# Altium PCB mantarray_beta2_sensor_back.PcbDoc
Units mm, origin at the board's own origin, x right, y up, seen from the top; angles counter-clockwise.
Board outline 170 x 250 mm, 6 copper layers (Top Layer, GND1, Signal1, Int3 (Sign), AVDD, Bottom Layer), stack 1.551 mm thick; 69 components, 203 nets, 440 pads, 69 vias.
Unrouted connection lines stored in the file: 166.
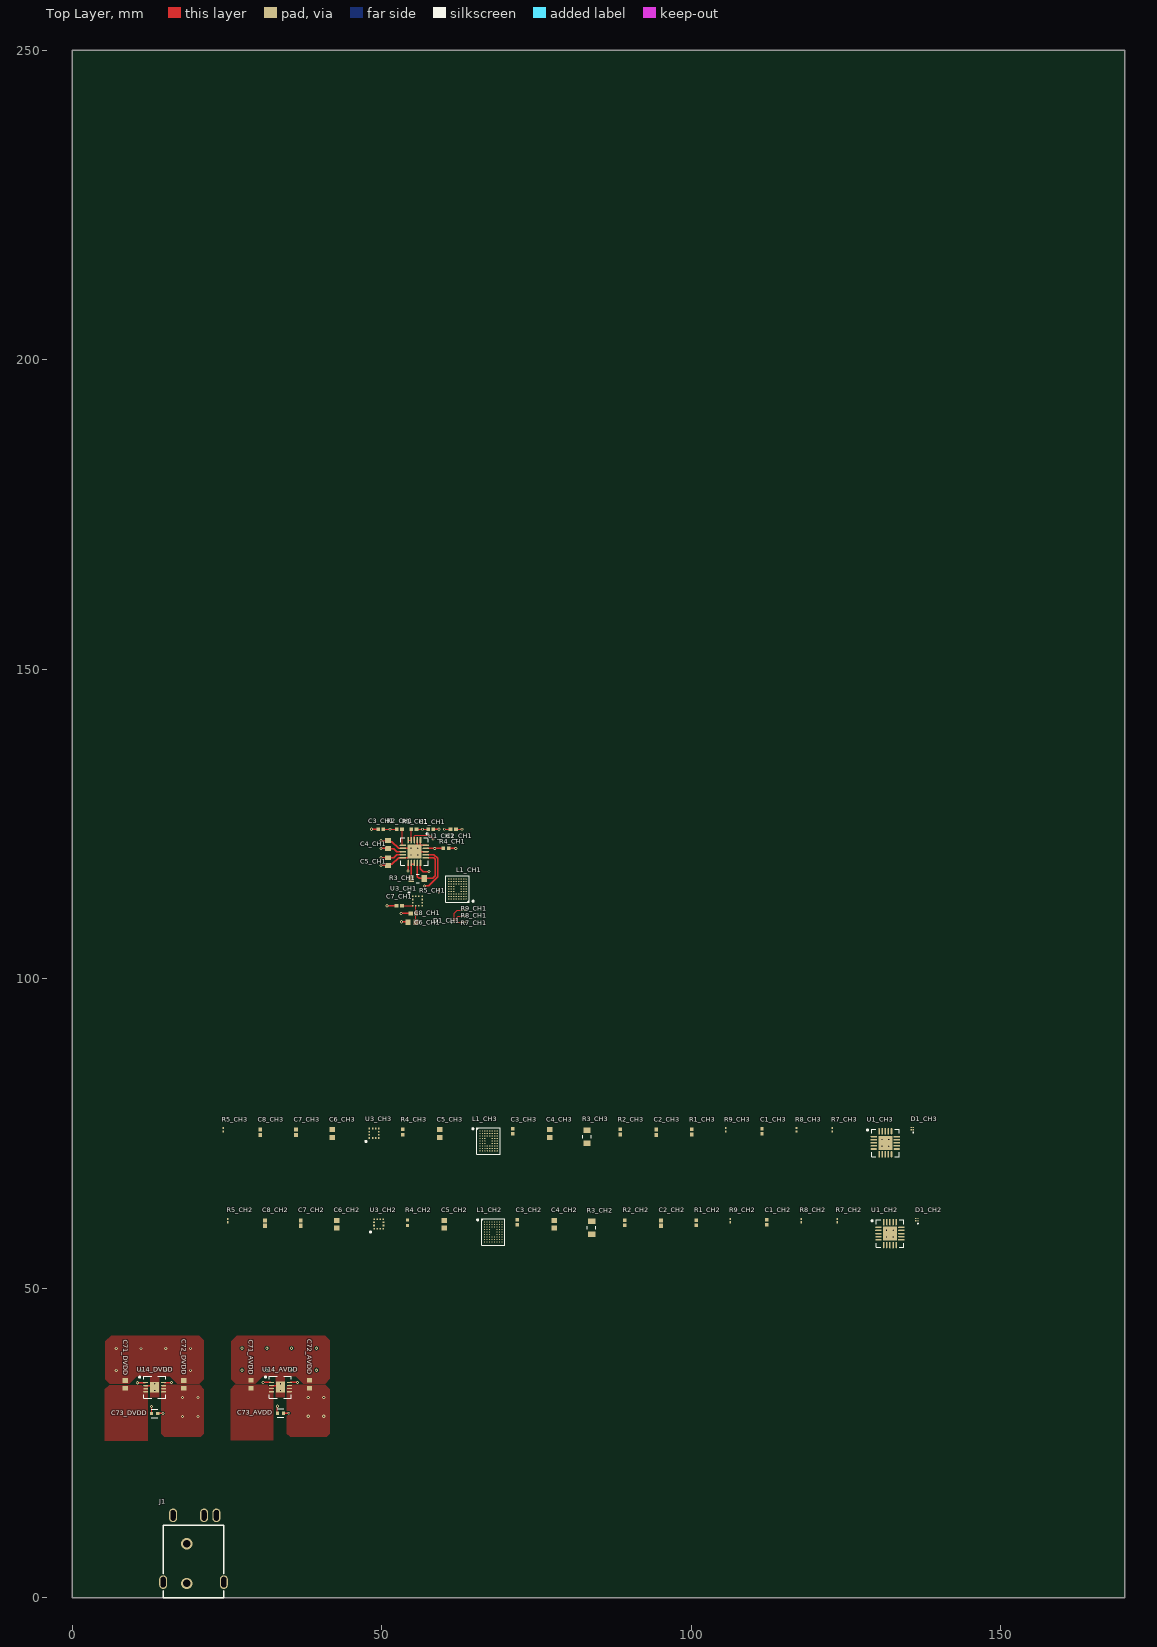
[diagram p0: Top Layer view]
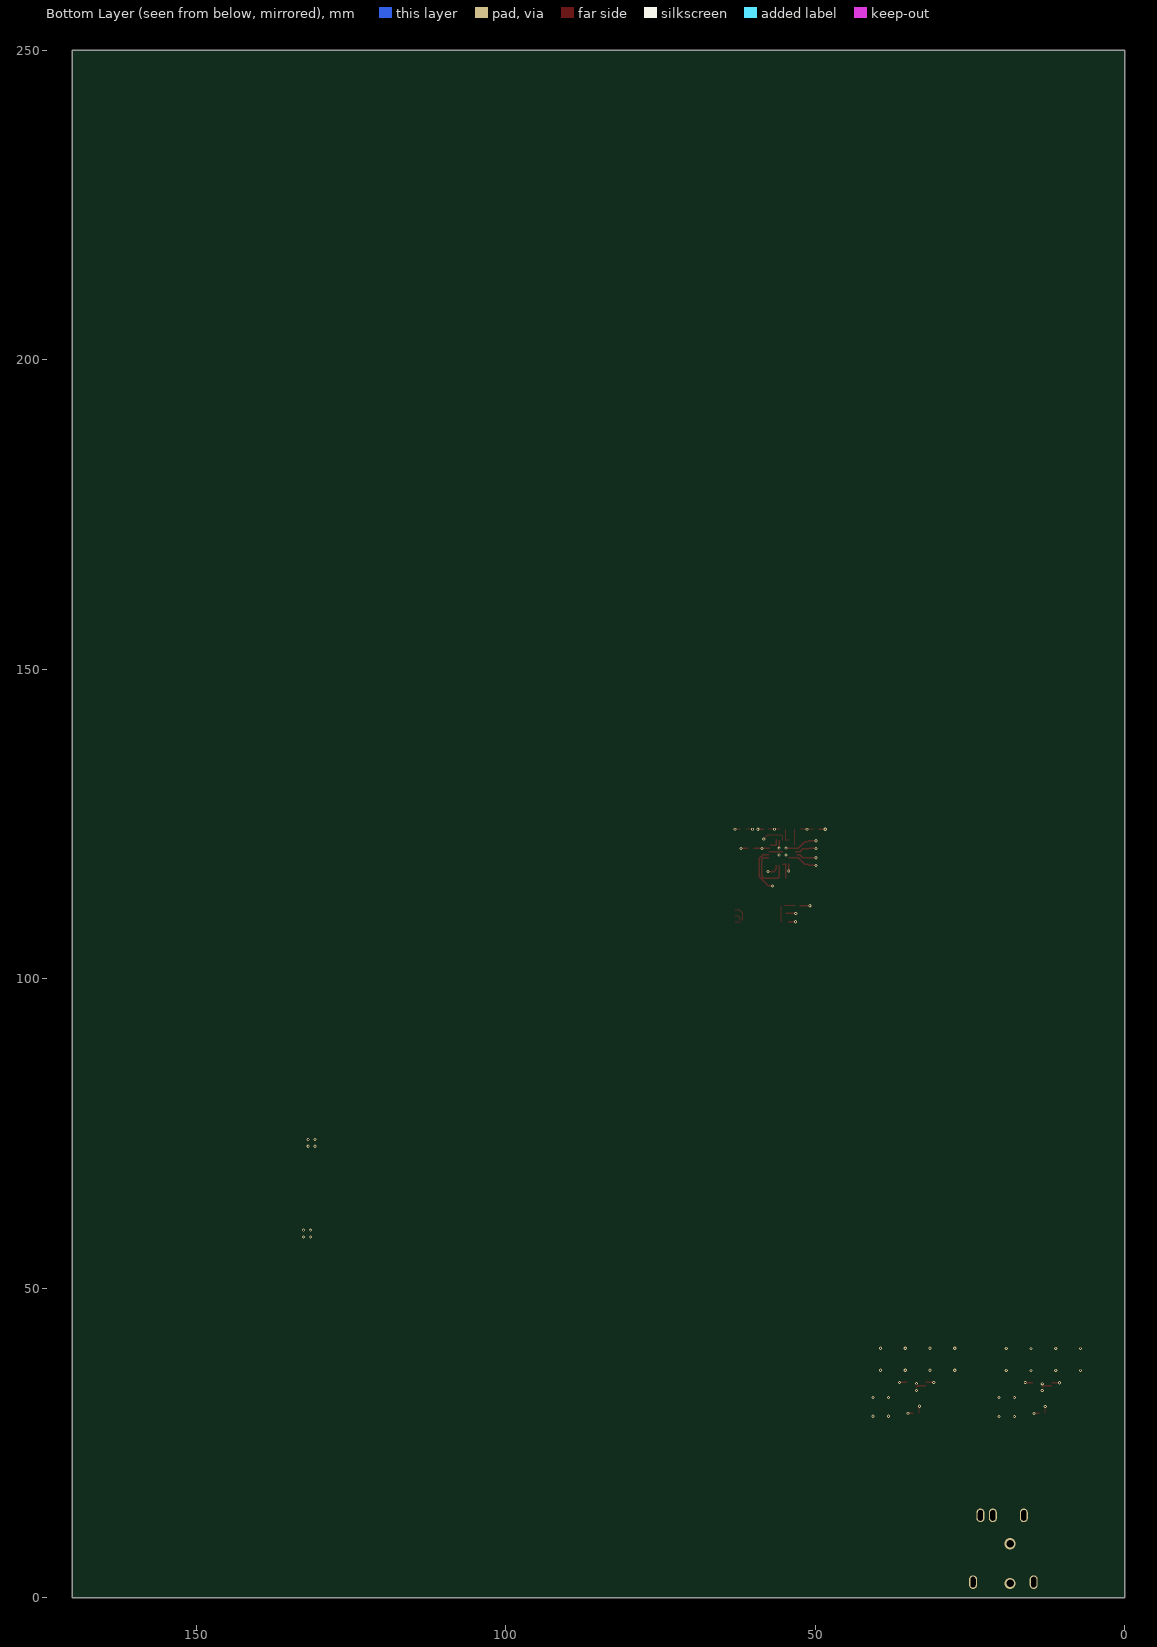
[diagram p1: Bottom Layer view, seen from below]
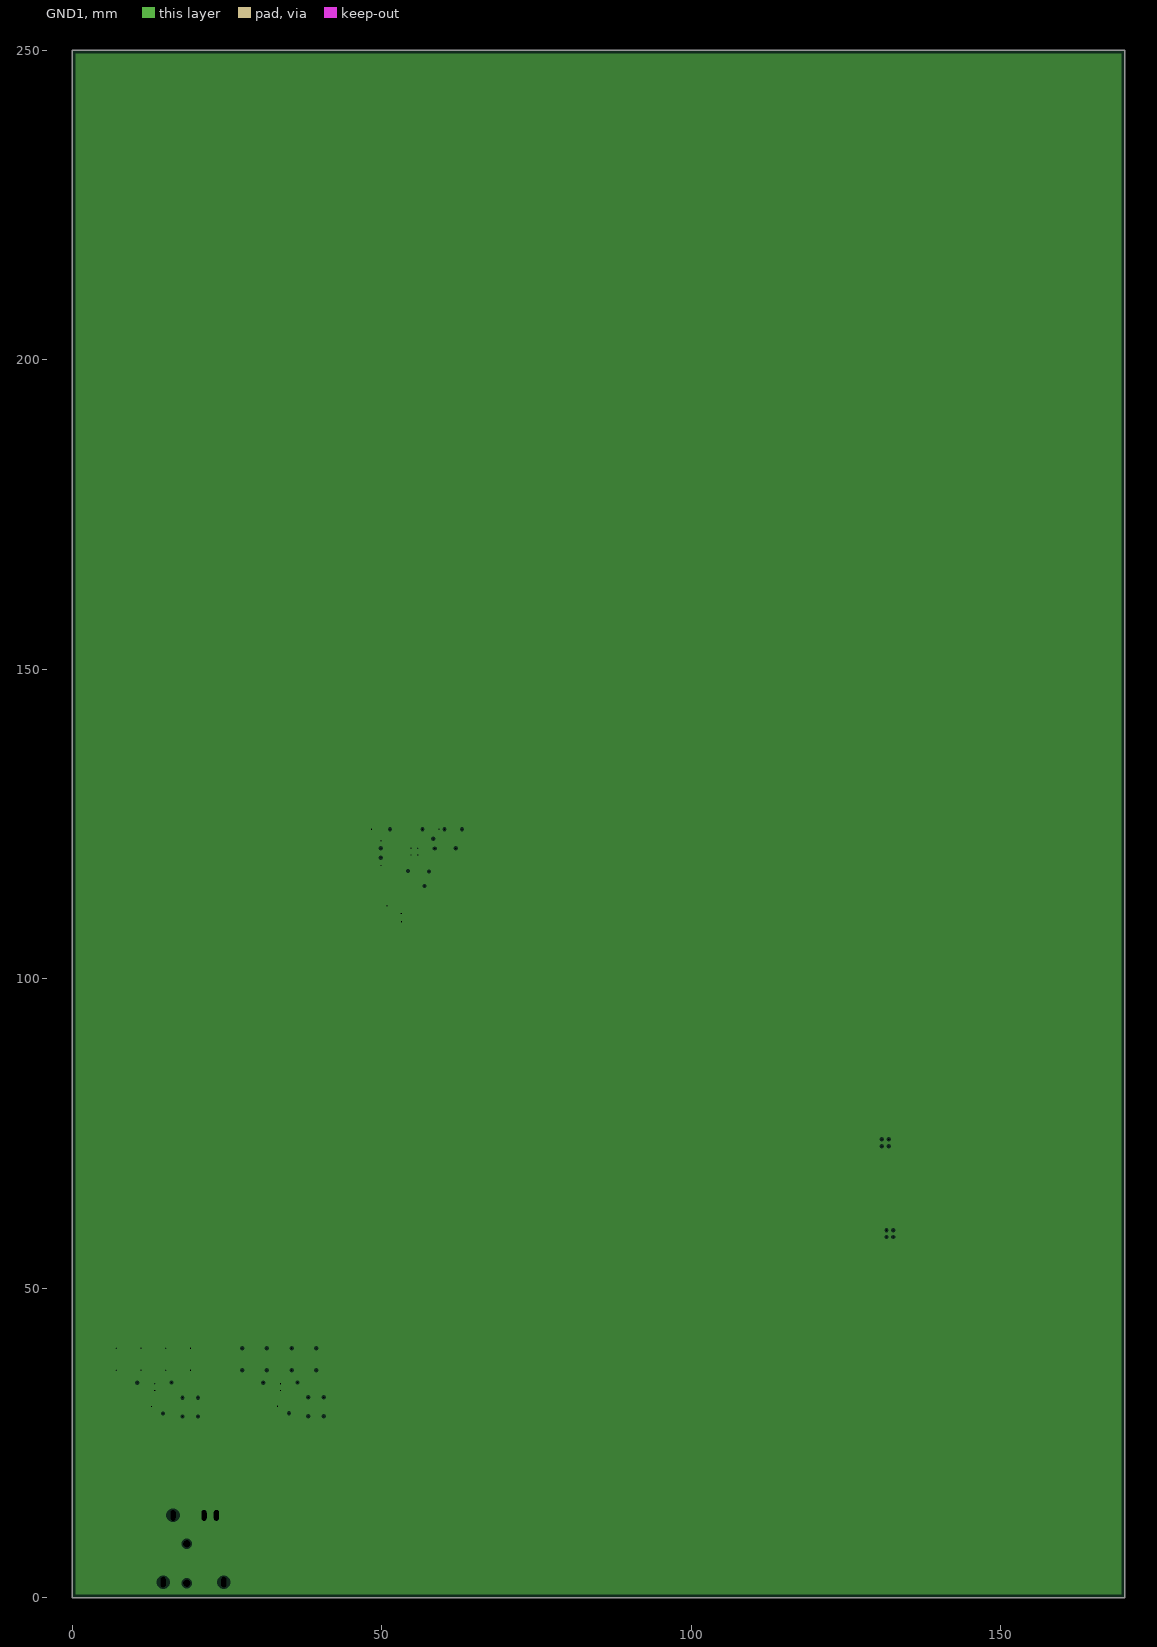
[diagram p2: GND1, clearances drawn from the general rule]
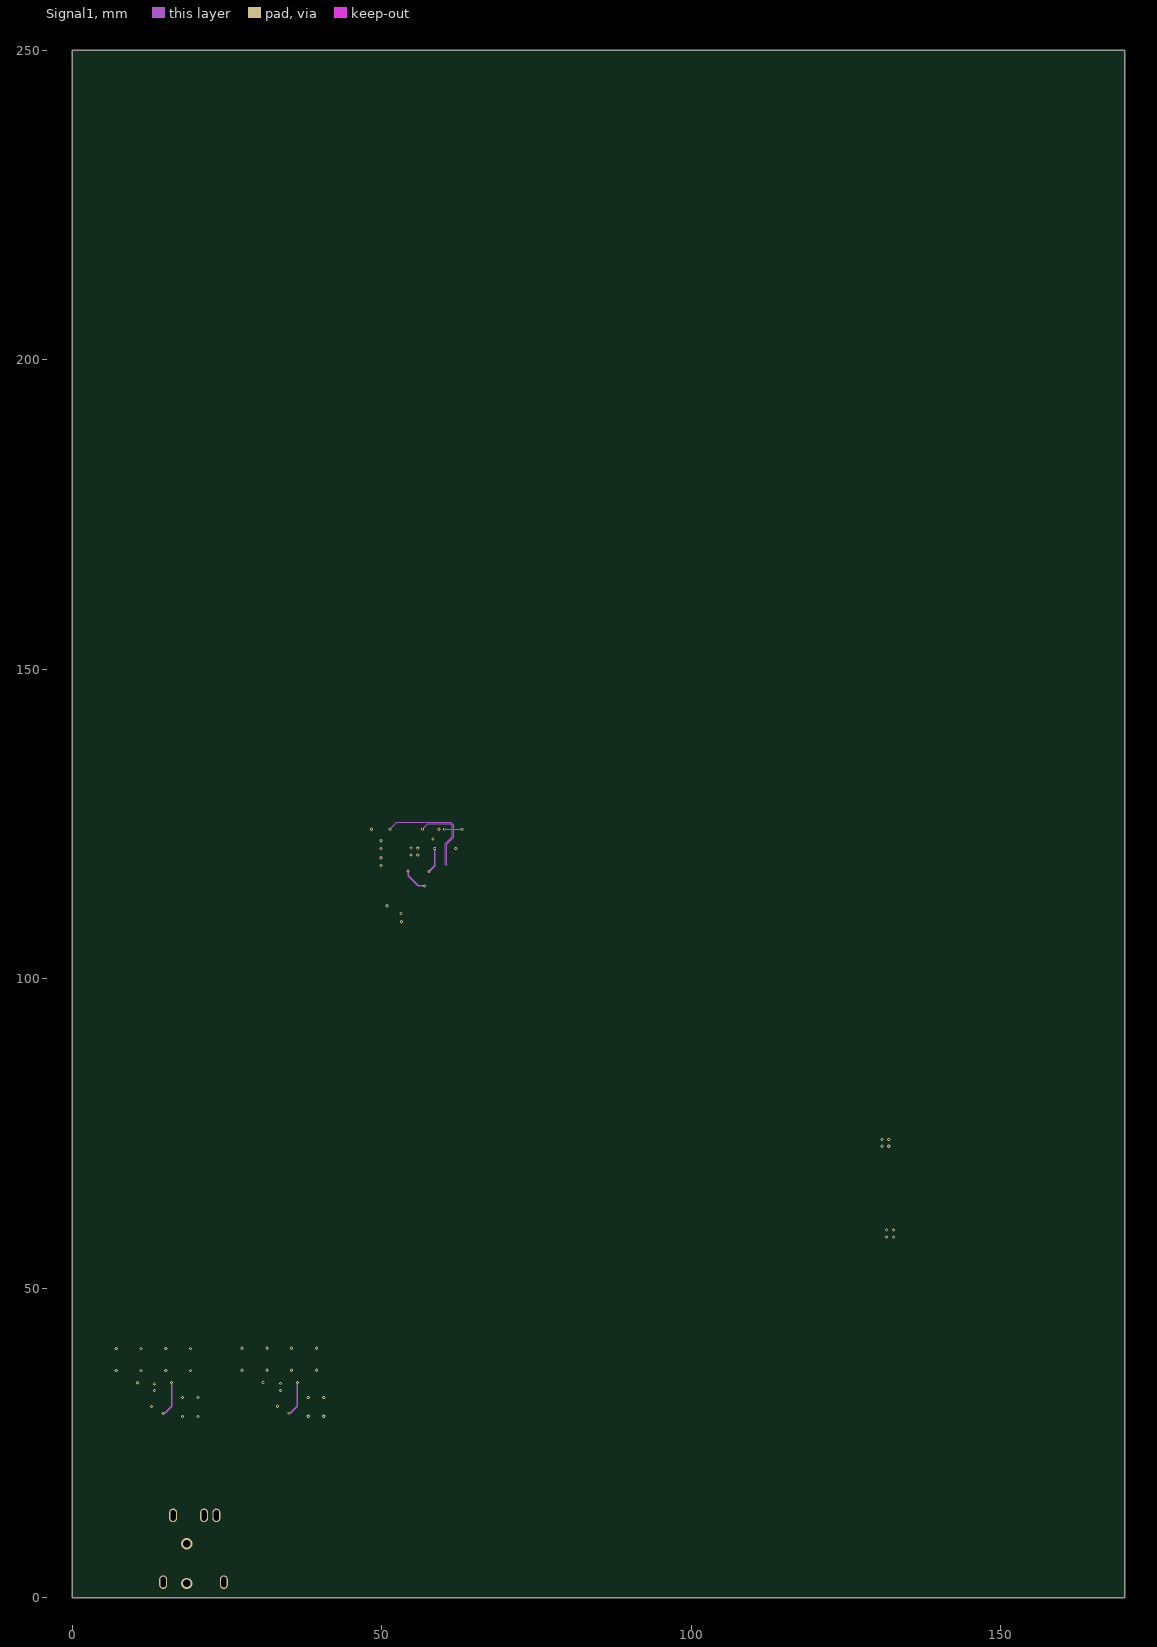
[diagram p3: Signal1]
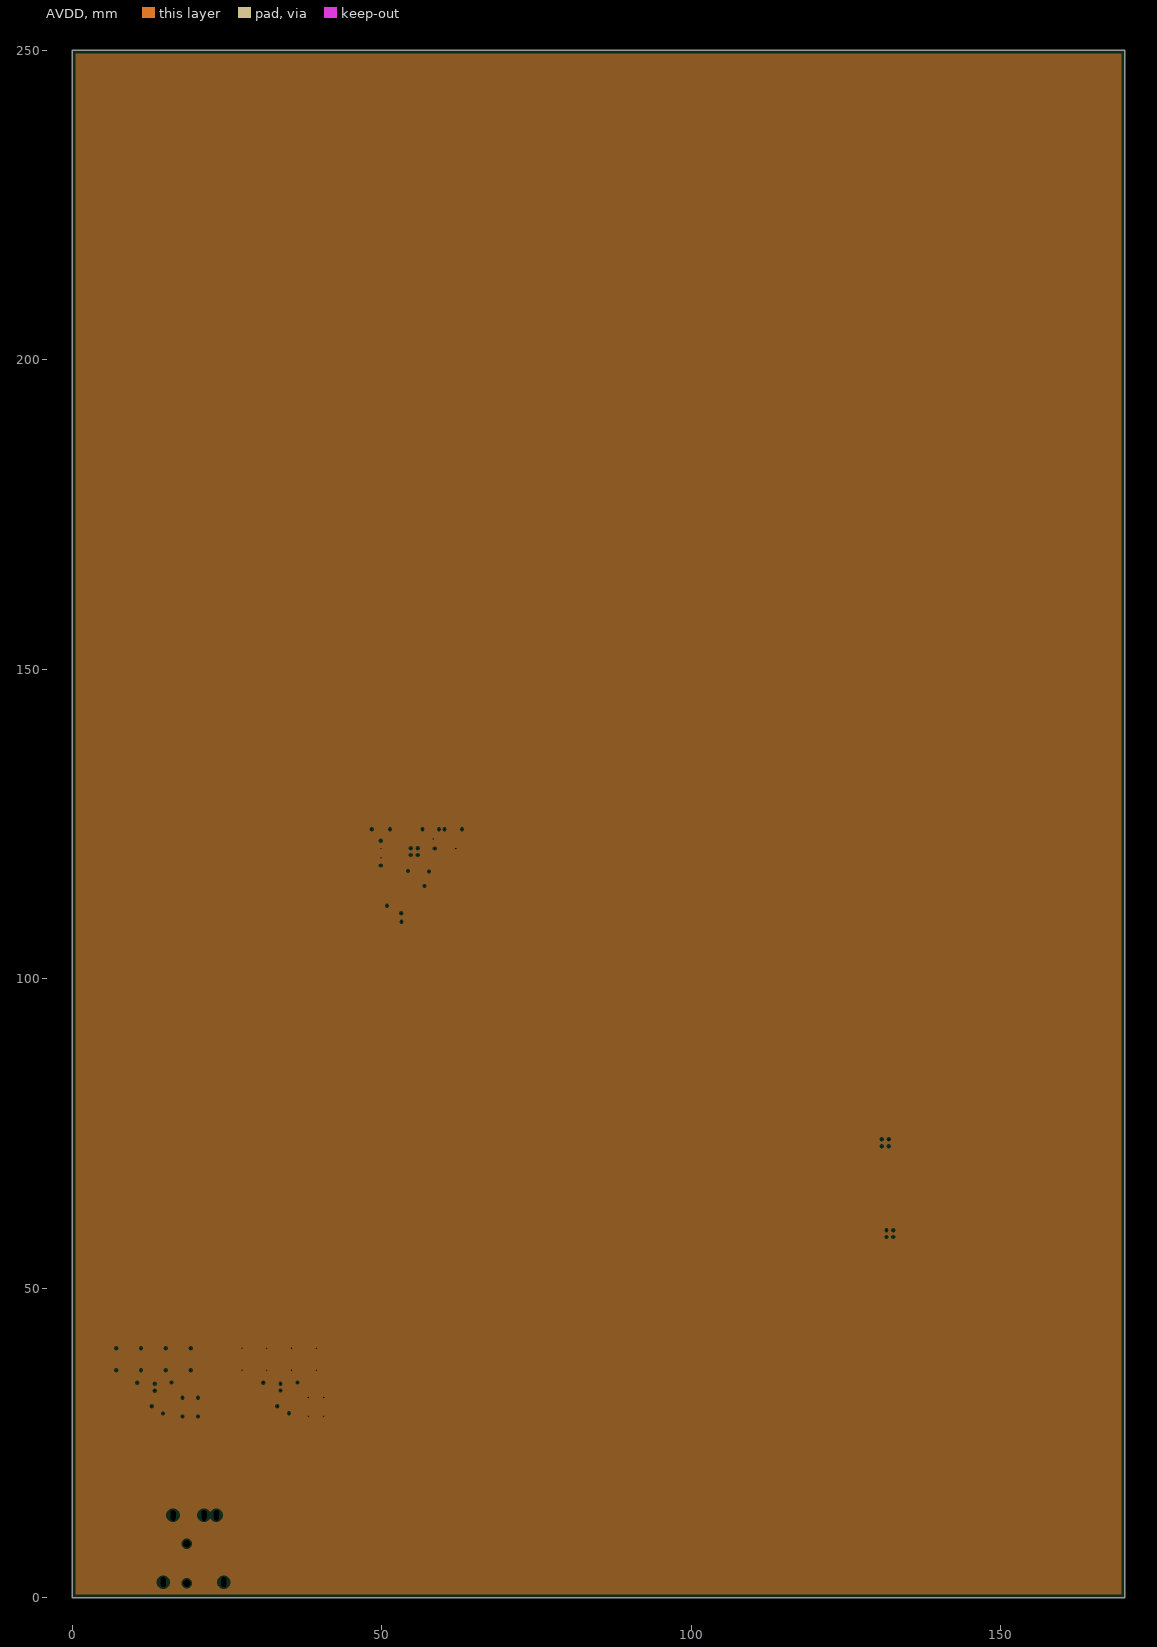
[diagram p4: AVDD, clearances drawn from the general rule]

## Layer stack, top to bottom
Top Solder: solder mask 0.0254, SM-001, Dk 4
Top Layer: signal copper 0.035
Dielectric 1: prepreg 0.0711, PP-006, Dk 4.1
Dielectric 2: prepreg 0.0711, PP-006, Dk 4.1
GND1: plane copper 0.035, net GND
Dielectric 3: core 0.4572, Core-035, Dk 4.7
Signal1: signal copper 0.035
Dielectric 4: prepreg 0.0711, PP-006, Dk 4.1
Dielectric 5: prepreg 0.0711, PP-006, Dk 4.1
Int3 (Sign): signal copper 0.035
Dielectric 6: core 0.4572, Core-035, Dk 4.7
AVDD: plane copper 0.035, net AVDD
Dielectric 7: prepreg 0.0711, PP-006, Dk 4.1
Dielectric 8: prepreg 0.0711, PP-006, Dk 4.1
Bottom Layer: signal copper 0.035
Bottom Solder: solder mask 0.0254, SM-001, Dk 4

## Board outline
0,0 170,0 170,250 0,250

## Design rules (kind name [scope] priority, off if disabled: settings)
Clearance "Clearance SPI CMOS" [InNetClass('SPI CMOS') vs InNetClass('SPI CMOS')] p1: gap=0.127 ignorepadtopadclearanceinfootprint=TRUE
Clearance [All] p2: gap=0.127 ignorepadtopadclearanceinfootprint=FALSE
DiffPairsRouting [All] p1: maxlimit=1.27 minlimit=0.127 mostfreqgap=0.127 toplayer_minwidth=0.127 toplayer_maxwidth=0.254 toplayer_prefwidth=0.127 midlayer1_minwidth=0.127 midlayer1_maxwidth=0.254 midlayer1_prefwidth=0.127 midlayer2_minwidth=0.127 midlayer2_maxwidth=0.254 midlayer2_prefwidth=0.127 bottomlayer_minwidth=0.127 bottomlayer_maxwidth=0.254 bottomlayer_prefwidth=0.127 maxuncoupledlength=25.4
HoleSize [All] p1: absolutevalues=TRUE maxlimit=5.08 minlimit=0.127 maxpercent=80.000 minpercent=20.000
MinimumAnnularRing [All] p1: minimumring=0.1
MinimumSolderMaskSliver SoldermaskSliver_pad [InPadClass('All Pads') vs InPadClass('All Pads')] p1: minsoldermaskwidth=0.025
MinimumSolderMaskSliver [All] p2: minsoldermaskwidth=0.025
PlaneClearance [All] p1: clearance=0.254
PlaneConnect [All] p1: planeconnectstyle=Direct reliefexpansion=0.508 reliefentries=4 reliefconductorwidth=0.254 reliefairgap=0.254
PolygonConnect PolygonConnect_1 [All vs IsNamedPolygon('GND_L01_P047')] p1: thpad.connectstyle=Direct thpad.reliefconductorwidth=0.254 thpad.reliefentries=4 thpad.polygonreliefangle="90 Angle" thpad.airgapwidth=0.254 smdpad.connectstyle=Direct smdpad.reliefconductorwidth=0.254 smdpad.reliefentries=4 smdpad.polygonreliefangle="90 Angle" smdpad.airgapwidth=0.254 via.connectstyle=Relief via.reliefconductorwidth=0.254 via.reliefentries=4 via.polygonreliefangle="90 Angle" via.airgapwidth=0.254
PolygonConnect [All] p2: connectstyle=Direct reliefconductorwidth=0.254 reliefentries=4 polygonreliefangle="90 Angle" airgapwidth=0.254
RoomDefinition CH3 [InComponentClass('CH3')] p1: confinementstyle=ConfineIn formatcopy=TRUE lockcomponents=FALSE outline 23.85,70.69 139.85,70.69 139.85,77.99 23.85,77.99
RoomDefinition CH2 [InComponentClass('CH2')] p2: confinementstyle=ConfineIn formatcopy=TRUE lockcomponents=FALSE outline 24.6,56.025 140.6,56.025 140.6,63.275 24.6,63.275
RoomDefinition mantarray_beta2_sensor [InComponentClass('mantarray_beta2_sensor')] p3: confinementstyle=ConfineIn formatcopy=TRUE lockcomponents=FALSE outline 0,0 50.8,0 50.8,25.4 0,25.4
RoomDefinition CH1 [InComponentClass('CH1')] p4: confinementstyle=ConfineIn formatcopy=TRUE lockcomponents=FALSE outline 46,107.8 65.5,107.8 65.5,127.3 46,127.3
RoomDefinition AVDD [InComponentClass('AVDD')] p5: confinementstyle=ConfineIn formatcopy=TRUE lockcomponents=FALSE outline 24.925,27.7 42.225,27.7 42.225,41.55 24.925,41.55
RoomDefinition DVDD [InComponentClass('DVDD')] p6: confinementstyle=ConfineIn formatcopy=TRUE lockcomponents=FALSE outline 4.599,27.675 21.899,27.675 21.899,41.525 4.599,41.525
RoutingVias PowerVias [InNetClass('POWER')] p1: holewidth=0.203 width=0.508 viastyle="Through Hole" minholewidth=0.203 minwidth=0.508 maxholewidth=0.203 maxwidth=1.27
RoutingVias [All] p2: holewidth=0.152 width=0.457 viastyle="Through Hole" minholewidth=0.127 minwidth=0.457 maxholewidth=0.5 maxwidth=1
SilkToSolderMaskClearance [IsPad] p1: minsilkscreentomaskgap=0.127 clearancetoexposedcopper=TRUE
SolderMaskExpansion [All] p1: expansion=0.127 istentingtop=FALSE
Width [All] p1: maxlimit=2 minlimit=0.127 preferedwidth=0.127
Width "SPI routing" [InNetClass('SPI CMOS')] p2: maxlimit=0.127 minlimit=0.127 preferedwidth=0.127
Width "Power width" [InNetClass('POWER')] p3: maxlimit=1.016 minlimit=0.203 preferedwidth=0.203
23 further rules are at their usual default settings.

## Classes and differential pairs
channel class Channel: CH1 CH2
component class CH2: C1_CH2 C2_CH2 C3_CH2 C4_CH2 C5_CH2 C6_CH2 C7_CH2 C8_CH2 D1_CH2 L1_CH2 R1_CH2 R2_CH2 R3_CH2 R4_CH2 R5_CH2 R7_CH2 R8_CH2 R9_CH2 U1_CH2 U3_CH2
component class CH1: C1_CH1 C2_CH1 C3_CH1 C4_CH1 C5_CH1 C6_CH1 C7_CH1 C8_CH1 D1_CH1 L1_CH1 R1_CH1 R2_CH1 R3_CH1 R4_CH1 R5_CH1 R7_CH1 R8_CH1 R9_CH1 U1_CH1 U3_CH1
channel class ADP1706_3p3: AVDD DVDD
component class DVDD: C71_DVDD C72_DVDD C73_DVDD U14_DVDD
component class AVDD: C71_AVDD C72_AVDD C73_AVDD U14_AVDD
component class mantarray_beta2_sensor: J1
net class Power: +5V AVDD AVDD_CH2 AVDD_CH3 AVDD_DVDD DVDD GND GND_CH2 GND_CH3
differential pair sd_adc1_in_CH3: +sd_adc1_in_CH3_P -sd_adc1_in_CH3_N
differential pair sd_adc1_in_CH2: +sd_adc1_in_CH2_P -sd_adc1_in_CH2_N
differential pair sd_adc1_in_CH1: +sd_adc1_in_CH1_P -sd_adc1_in_CH1_N

## Components (designator, comment, footprint, x,y, rotation, side; value= is the part's Value field where it differs from the comment)
C1_CH1 "GRM155R71C103KA01J" CAPC1005X55X25LL05T10 57.925,124.15 r180 top locked (schematic designator C1)
C1_CH2 "GRM155R71C103KA01J" CAPC1005X55X25LL05T10 112.2,60.675 r90 top (schematic designator C1)
C1_CH3 "GRM155R71C103KA01J" CAPC1005X55X25LL05T10 111.45,75.34 r90 top (schematic designator C1)
C2_CH1 "GRM155R71C104KA88D" CAPC1005X55X25NL05T10 61.55,124.15 r180 top locked (schematic designator C2)
C2_CH2 "GRM155R71C104KA88D" CAPC1005X55X25NL05T10 95.1,60.525 r90 top (schematic designator C2)
C2_CH3 "GRM155R71C104KA88D" CAPC1005X55X25NL05T10 94.35,75.19 r90 top (schematic designator C2)
C3_CH1 "GRM155R71C103KA01J" CAPC1005X55X25LL05T10 49.81,124.15 r0 top locked (schematic designator C3)
C3_CH2 "GRM155R71C103KA01J" CAPC1005X55X25LL05T10 71.9,60.675 r90 top (schematic designator C3)
C3_CH3 "GRM155R71C103KA01J" CAPC1005X55X25LL05T10 71.15,75.34 r90 top (schematic designator C3)
C4_CH1 "C0603C105K3RACTU" CAPC1608X87X35LL15T15 51,121.675 r270 top locked (schematic designator C4)
C4_CH2 "C0603C105K3RACTU" CAPC1608X87X35LL15T15 77.85,60.325 r90 top (schematic designator C4)
C4_CH3 "C0603C105K3RACTU" CAPC1608X87X35LL15T15 77.1,74.99 r90 top (schematic designator C4)
C5_CH1 "C0603C105K3RACTU" CAPC1608X87X35LL15T15 51,118.925 r90 top locked (schematic designator C5)
C5_CH2 "C0603C105K3RACTU" CAPC1608X87X35LL15T15 60.1,60.325 r90 top (schematic designator C5)
C5_CH3 "C0603C105K3RACTU" CAPC1608X87X35LL15T15 59.35,74.99 r90 top (schematic designator C5)
C6_CH1 "C0603C105K3RACTU" CAPC1608X87X35LL15T15 54.875,109.15 r0 top locked (schematic designator C6)
C6_CH2 "C0603C105K3RACTU" CAPC1608X87X35LL15T15 42.75,60.325 r90 top (schematic designator C6)
C6_CH3 "C0603C105K3RACTU" CAPC1608X87X35LL15T15 42,74.99 r90 top (schematic designator C6)
C7_CH1 "GRM155R71C104KA88D" CAPC1005X55X25NL05T10 52.825,111.8 r0 top locked (schematic designator C7)
C7_CH2 "GRM155R71C104KA88D" CAPC1005X55X25NL05T10 36.9,60.525 r90 top (schematic designator C7)
C7_CH3 "GRM155R71C104KA88D" CAPC1005X55X25NL05T10 36.15,75.19 r90 top (schematic designator C7)
C8_CH1 "GRM155R71C104KA88D" CAPC1005X55X25NL05T10 55.109,110.55 r0 top locked (schematic designator C8)
C8_CH2 "GRM155R71C104KA88D" CAPC1005X55X25NL05T10 31.1,60.525 r90 top (schematic designator C8)
C8_CH3 "GRM155R71C104KA88D" CAPC1005X55X25NL05T10 30.35,75.19 r90 top (schematic designator C8)
C71_AVDD "GRM188R61E475KE11D" CAPC1608X90X35LL10T15 28.875,34.475 r270 top (schematic designator C71)
C71_DVDD "GRM188R61E475KE11D" CAPC1608X90X35LL10T15 8.549,34.45 r270 top (schematic designator C71)
C72_AVDD "GRM188R61E475KE11D" CAPC1608X90X35LL10T15 38.325,34.475 r270 top (schematic designator C72)
C72_DVDD "GRM188R61E475KE11D" CAPC1608X90X35LL10T15 17.999,34.45 r270 top (schematic designator C72)
C73_AVDD "CC0402KRX7R7BB103" FP-CC0402-MFG 33.625,29.8 r180 top value="10 nF" (schematic designator C73)
C73_DVDD "CC0402KRX7R7BB103" FP-CC0402-MFG 13.299,29.775 r180 top value="10 nF" (schematic designator C73)
D1_CH1 "XZBGRBBRMER158W" 4-SMD 61.875,109.275 r0 top locked (schematic designator D1)
D1_CH2 "XZBGRBBRMER158W" 4-SMD 136.45,61.075 r90 top (schematic designator D1)
D1_CH3 "XZBGRBBRMER158W" 4-SMD 135.7,75.79 r90 top (schematic designator D1)
J1 "PJ-001AH-67" PJ-001AH-67 16.275,13.3 r90 top
L1_CH1 "STM32F378RCY6TR" STM-WLCSP66 62.225,114.5 r180 top locked (schematic designator L1)
L1_CH2 "STM32F378RCY6TR" STM-WLCSP66 68,59.075 r0 top (schematic designator L1)
L1_CH3 "STM32F378RCY6TR" STM-WLCSP66 67.25,73.79 r0 top (schematic designator L1)
R1_CH1 "RC0402FR-071KL" RESC1005X40X25NL05T10 55.175,124.15 r0 top locked (schematic designator R1)
R1_CH2 "RC0402FR-071KL" RESC1005X40X25NL05T10 100.8,60.575 r90 top (schematic designator R1)
R1_CH3 "RC0402FR-071KL" RESC1005X40X25NL05T10 100.05,75.24 r90 top (schematic designator R1)
R2_CH1 "RC0402FR-071KL" RESC1005X40X25NL05T10 52.85,124.15 r180 top locked (schematic designator R2)
R2_CH2 "RC0402FR-071KL" RESC1005X40X25NL05T10 89.25,60.575 r90 top (schematic designator R2)
R2_CH3 "RC0402FR-071KL" RESC1005X40X25NL05T10 88.5,75.24 r90 top (schematic designator R2)
R3_CH1 "RT0805BRD0722RL" FP-RT0805-MFG 55.8,116.2 r180 top locked value=22Ω (schematic designator R3)
R3_CH2 "RT0805BRD0722RL" FP-RT0805-MFG 83.9,59.775 r90 top value=22Ω (schematic designator R3)
R3_CH3 "RT0805BRD0722RL" FP-RT0805-MFG 83.15,74.49 r90 top value=22Ω (schematic designator R3)
R4_CH1 "CRCW040210K0FKED" RESC1005X40X25NL05T05 60.35,121.05 r180 top locked (schematic designator R4)
R4_CH2 "CRCW040210K0FKED" RESC1005X40X25NL05T05 54.15,60.575 r90 top (schematic designator R4)
R4_CH3 "CRCW040210K0FKED" RESC1005X40X25NL05T05 53.4,75.24 r90 top (schematic designator R4)
R5_CH1 "ERJ1GNF1003C" RESC0603X26X15LL03T05 59.2,114.225 r90 top locked (schematic designator R5)
R5_CH2 "ERJ1GNF1003C" RESC0603X26X15LL03T05 25.1,60.925 r90 top (schematic designator R5)
R5_CH3 "ERJ1GNF1003C" RESC0603X26X15LL03T05 24.35,75.59 r90 top (schematic designator R5)
R7_CH1 "CRCW0201220RFNED" RESC0603X28X15LL05T05 63.225,109.1 r0 top locked (schematic designator R7)
R7_CH2 "CRCW0201220RFNED" RESC0603X28X15LL05T05 123.55,60.925 r90 top (schematic designator R7)
R7_CH3 "CRCW0201220RFNED" RESC0603X28X15LL05T05 122.8,75.59 r90 top (schematic designator R7)
R8_CH1 "CRCW0201100RFKED" RESC0603X28X15LL05T05 63.225,110.1 r0 top locked (schematic designator R8)
R8_CH2 "CRCW0201100RFKED" RESC0603X28X15LL05T05 117.75,60.925 r90 top (schematic designator R8)
R8_CH3 "CRCW0201100RFKED" RESC0603X28X15LL05T05 117,75.59 r90 top (schematic designator R8)
R9_CH1 "CRCW0201100RFKED" RESC0603X28X15LL05T05 63.225,111.075 r0 top locked (schematic designator R9)
R9_CH2 "CRCW0201100RFKED" RESC0603X28X15LL05T05 106.3,60.925 r90 top (schematic designator R9)
R9_CH3 "CRCW0201100RFKED" RESC0603X28X15LL05T05 105.55,75.59 r90 top (schematic designator R9)
U1_CH1 "DRV425" QFN50P400X400X80_HS-21N 55.25,120.55 r270 top locked (schematic designator U1)
U1_CH2 "DRV425" QFN50P400X400X80_HS-21N 132.1,58.825 r0 top (schematic designator U1)
U1_CH3 "DRV425" QFN50P400X400X80_HS-21N 131.35,73.49 r0 top (schematic designator U1)
U3_CH1 "LIS3MDLTR" STM-LGA-12 55.749,112.55 r0 top locked (schematic designator U3)
U3_CH2 "LIS3MDLTR" STM-LGA-12 49.5,60.375 r90 top (schematic designator U3)
U3_CH3 "LIS3MDLTR" STM-LGA-12 48.75,75.04 r90 top (schematic designator U3)
U14_AVDD "ADP1706ACPZ-3.3-R7" ADI-CP-8-2_L 33.625,34.025 r0 top (schematic designator U14)
U14_DVDD "ADP1706ACPZ-3.3-R7" ADI-CP-8-2_L 13.299,34 r0 top (schematic designator U14)

## Footprints (in the part's own frame and the unit in brackets; to place one, negate y for a bottom-side part, rotate by r counter-clockwise, add the part's x,y. Pads: shape width x height; smd on the part's side, far side on the other; paste and mask are expansions set on the pad)
4-SMD [mm] "4-lead package for SMD LED"
  rect 0.2x0.2 smd: 1(-0.175,-0.175) 2(-0.175,0.175) 3(0.175,0.175) 4(0.175,-0.175)
  silkscreen extent -0.65,-0.2 -0.6,-0.15, body extent -0.33,-0.33 0.33,0.33, height 0.2
ADI-CP-8-2_L [mm] "QFN, 8-Leads, Body 3x3mm, Pitch 0.5mm, Thermal Pad 1.45X1.74mm, IPC High Density"
  oval 0.8x0.2 smd: 1(-1.45,0.75) 2(-1.45,0.25) 3(-1.45,-0.25) 4(-1.45,-0.75) 5(1.45,-0.75) 6(1.45,-0.25) 7(1.45,0.25) 8(1.45,0.75)
  rect 1.45x1.74 smd: 9(0,0)
  silkscreen extent -2.55,-1.78 1.78,1.78, body extent -1.63,-1.63 1.63,1.63, height 0.9
CAPC1005X55X25LL05T10 [mm] "Chip Capacitor, 2-Leads, Body 1.00x0.50mm, IPC High Density"
  rect 0.56x0.52 smd: 1(-0.39,0) 2(0.39,0)
  body extent -0.53,-0.28 0.53,0.28, height 0.55
CAPC1005X55X25NL05T10 [mm] "Chip Capacitor, 2-Leads, Body 1.05x0.55mm, IPC Medium Density"
  rect 0.66x0.62 smd: 1(-0.44,0) 2(0.44,0)
  body extent -0.53,-0.28 0.53,0.28, height 0.55
CAPC1608X87X35LL15T15 [mm] "Chip Capacitor, 2-Leads, Body 1.60x0.80mm, IPC High Density"
  rect 0.8x0.9 smd: 1(-0.625,0) 2(0.625,0)
  body extent -0.87,-0.48 0.87,0.48, height 0.87
CAPC1608X90X35LL10T15 [mm] "Chip Capacitor, 2-Leads, Body 1.60x0.80mm, IPC High Density"
  rect 0.75x0.85 smd: 1(-0.625,0) 2(0.625,0)
  body extent -0.85,-0.45 0.85,0.45, height 0.9
FP-CC0402-MFG [mm]
  rect 0.5x0.5 smd paste+0 mask+0: 1(-0.5,0) 2(0.5,0)
  silkscreen extent -0.53,-0.68 0.53,0.67, body extent -0.87,-0.48 0.87,0.48, height 0.25
FP-RT0805-MFG [mm]
  rect 0.9x1.2 smd paste+0 mask+0: 1(-1.05,0) 2(1.05,0)
  silkscreen extent -0.23,-0.67 0.23,0.67, body extent -1.6,-0.77 1.6,0.77, height 0.25
PJ-001AH-67 [mm]
  oval 2.2x1.3 hole 0.8 slot 1.7 at 0 deg: 1(0,0) 2(0,-7) 3(0,-5) ""(-10.8,-8.2) ""(-10.8,1.6)
  silkscreen extent -13.3,-8.2 -1.6,1.6, body extent -16.65,-8.4 0.65,2.25, height 8.2
QFN50P400X400X80_HS-21N [mm] "QFN, 20-Leads, Body 4.00x4.00mm, Pitch 0.50mm, Thermal Pad 2.25x2.25mm, IPC Medium Density"
  oval 1.05x0.25 smd: 1(-1.85,1) 2(-1.85,0.5) 3(-1.85,0) 4(-1.85,-0.5) 5(-1.85,-1) 11(1.85,-1) 12(1.85,-0.5) 13(1.85,0) 14(1.85,0.5) 15(1.85,1)
  oval 0.25x1.05 smd: 6(-1,-1.85) 7(-0.5,-1.85) 8(0,-1.85) 9(0.5,-1.85) 10(1,-1.85) 16(1,1.85) 17(0.5,1.85) 18(0,1.85) 19(-0.5,1.85) 20(-1,1.85)
  rect 2.25x2.25 smd: 21(0,0)
  silkscreen extent -3,-2.23 2.23,2.22, body extent -2.07,-2.08 2.08,2.07, height 0.8
RESC0603X26X15LL03T05 [mm] "Chip Resistor, 2-Leads, Body 0.60x0.30mm, IPC High Density"
  rect 0.35x0.25 smd: 1(-0.275,0) 2(0.275,0)
  body extent -0.32,-0.16 0.31,0.17, height 0.26
RESC0603X28X15LL05T05 [mm] "Chip Resistor, 2-Leads, Body 0.60x0.30mm, IPC High Density"
  rect 0.35x0.25 smd: 1(-0.275,0) 2(0.275,0)
  body extent -0.33,-0.17 0.32,0.18, height 0.28
RESC1005X40X25NL05T05 [mm] "Chip Resistor, 2-Leads, Body 1.00x0.50mm, IPC Medium Density"
  rect 0.55x0.55 smd: 1(-0.45,0) 2(0.45,0)
  body extent -0.53,-0.27 0.53,0.28, height 0.4
RESC1005X40X25NL05T10 [mm] "Chip Resistor, 2-Leads, Body 1.00x0.50mm, IPC Medium Density"
  rect 0.6x0.55 smd: 1(-0.425,0) 2(0.425,0)
  body extent -0.53,-0.27 0.53,0.28, height 0.4
STM-LGA-12 [mm] "LGA, 12-Leads, Body 2x2mm, Pitch 0.5mm"
  rect 0.275x0.25 smd: 1(-0.763,0.75) 2(-0.763,0.25) 3(-0.763,-0.25) 4(-0.763,-0.75) 7(0.763,-0.75) 8(0.763,-0.25) 9(0.763,0.25) 10(0.763,0.75)
  rect 0.25x0.275 smd: 5(-0.25,-0.762) 6(0.25,-0.762) 11(0.25,0.763) 12(-0.25,0.763)
  silkscreen extent -1.45,1.2 -1.2,1.45, body extent -1,-1 1,1, height 1
STM-WLCSP66 [mm] "BGA, 66-Balls, Body 4.23x3.77mm, Pitch 0.4mm"
  round 0.2 smd: A1(-1.4,1.6) A2(-1,1.6) A3(-0.6,1.6) A4(-0.2,1.6) A5(0.2,1.6) A6(0.6,1.6) A7(1,1.6) A8(1.4,1.6) B1(-1.4,1.2) B2(-1,1.2) B3(-0.6,1.2) B4(-0.2,1.2) B5(0.2,1.2) B6(0.6,1.2) B7(1,1.2) B8(1.4,1.2) C1(-1.4,0.8) C2(-1,0.8) C3(-0.6,0.8) C4(-0.2,0.8) C5(0.2,0.8) C6(0.6,0.8) C7(1,0.8) C8(1.4,0.8) D1(-1.4,0.4) D2(-1,0.4) D3(-0.6,0.4) D6(0.6,0.4) D7(1,0.4) D8(1.4,0.4) E1(-1.4,0) E2(-1,0) E3(-0.6,0) E6(0.6,0) E7(1,0) E8(1.4,0) F1(-1.4,-0.4) F2(-1,-0.4) F3(-0.6,-0.4) F6(0.6,-0.4) F7(1,-0.4) F8(1.4,-0.4) G1(-1.4,-0.8) G2(-1,-0.8) G3(-0.6,-0.8) G4(-0.2,-0.8) G5(0.2,-0.8) G6(0.6,-0.8) G7(1,-0.8) G8(1.4,-0.8) H1(-1.4,-1.2) H2(-1,-1.2) H3(-0.6,-1.2) H4(-0.2,-1.2) H5(0.2,-1.2) H6(0.6,-1.2) H7(1,-1.2) H8(1.4,-1.2) J1(-1.4,-1.6) J2(-1,-1.6) J3(-0.6,-1.6) J4(-0.2,-1.6) J5(0.2,-1.6) J6(0.6,-1.6) J7(1,-1.6) J8(1.4,-1.6)
  silkscreen extent -2.65,-2.12 1.88,2.12, body extent -1.89,-2.11 1.89,2.11, height 0.6

## Part data
C1_CH1 C1_CH2 C1_CH3 C3_CH1 C3_CH2 C3_CH3: library part CMP-2008-04598-1, Manufacturer=Murata, Part Number=GRM155R71C103KA01J
C2_CH1 C2_CH2 C2_CH3 C7_CH1 C7_CH2 C7_CH3 C8_CH1 C8_CH2 C8_CH3: library part CMP-2100-03641-1, "Chip Capacitor, 0.1 uF, +/- 10%, 16 V, -55 to 125 degC, 0402 (1005 Metric), RoHS, Tape and Reel", Capacitance=100nF, Case Code (Imperial)=0402, Case Code (Metric)=1005, Dielectric=X7R, Dielectric Material=Ceramic, Insulation Resistance=10GR, Manufacturer=Murata, Max Operating Temperature=125degC, Min Operating Temperature=-55degC, Package Description="2-Pin Surface Mount Device, Body 1 x 0.5 mm", Package Quantity=1, Tolerance=10%, Voltage=16V, Case/Package=0402, Datasheet URL=http://psearch.en.murata.com/capacitor/product/GRM155R71C104KA88%23.pdf, Datasheet Version=42675.0, Depth=0.5mm, Height=0.5mm, Lead Free=LeadFree, Length=1mm, Manufacturer URL=http://www.murata.com/, Material=Ceramic, Mount=SurfaceMount, Number of Pins=2, Package Reference=0402, Packaging=TapeandReel, Radiation Hardening=No, REACH SVHC=NoSVHC, RoHSCompliant=true, Termination=SMD/SMT, Thickness=0.022inch, Voltage Rating=16V, Voltage Rating (DC)=16V, Width=0.5mm
C4_CH1 C4_CH2 C4_CH3 C5_CH1 C5_CH2 C5_CH3 C6_CH1 C6_CH2 C6_CH3: library part CMP-2006-03713-1, Manufacturer=Kemet, Part Number=C0603C105K3RACTU
C71_AVDD C71_DVDD C72_AVDD C72_DVDD: library part CMP-2006-02523-1, Manufacturer=Murata, Part Number=GRM188R61E475KE11D
C73_AVDD C73_DVDD: library part CMP-03422-000501-1, "CAP CER 10000PF 16V X7R 0402", Capacitance="10 nF", Manufacturer=YAGEO, Package=CC0402, Temperature="-55°C to +125°C", Temperature Characteristic=X7R, Temperature Coefficient=30ppm/°C, Temperature Range High=+125°C, Temperature Range Low=-55°C, Tolerance=0.1, Voltage Rating="16 V", Automotive=No, Automotive Grade=NA, Category=Cap, ComponentLink2Description=Datasheet, ComponentLink2URL=http://www.yageo.com/documents/recent/UPY-GP_NP0_16V-to-50V_16.pdf, Device Class L1="Passive Components", Device Class L2=Capacitors, Device Class L3="Ceramic Capacitors", Digikey Description="CAP CER 10000PF 16V X7R 0402", Footprint Url=http://www.yageo.com/exep/pages/download/literatures/UPY-C_GEN_24.pdf, Height=0.55mm, Ipc Land Pattern Name=CAPC10050X50, Lead Free=Yes, Manufacturer Part Number=CC0402KRX7R7BB103, Material=Ceramic, Mouser Description="0402 10 nF 16 V ±10 % Tolerance X7R SMT Multilayer Ceramic Capacitor", Octopart=https://octopart.com/cc0402krx7r7bb103-yageo-192895, RoHS=TRUE
D1_CH1 D1_CH2 D1_CH3: "0.65x0.65x0.20mm (0202) Full-Color Surface Mount LED"
J1: "IP67 waterproof DC Power Jack"
L1_CH1 L1_CH2 L1_CH3: library part CMP-0537-00090-1, "ARM Cortex-M4 32-bit MCU, 256 KB Flash, 32 KB Internal RAM, 52 I/Os, 66-Pin WLCSP, -40 to 85 degC, Tape and Reel", I/Os (High Current)=52, Operating Frequency(F) (Processor speed) (MHz)=72, Package Description="66-Ball Wafer Level Chip Size package, 3.767 x 4.229 mm Body, 0.4 mm Pitch", Package Reference=WLCSP66, Supply Voltage(Vcc) min (V)=1.65, ComponentLink1Description="Manufacturer URL", ComponentLink1URL=http://www.st.com/, ComponentLink2Description=Datasheet, ComponentLink2URL=http://www.st.com/st-web-ui/static/active/en/resource/technical/document/datasheet/DM00101621.pdf, Core="ARM Cortex-M4", D/A Converter=3, DatasheetVersion="Rev. 4", FLASH Size (Prog) (kB)=256, Internal RAM Size (kB)=32, Mounting Technology="Surface Mount", Packing="Tape and Reel"
R1_CH1 R1_CH2 R1_CH3 R2_CH1 R2_CH2 R2_CH3: library part CMP-2002-07472-1, Manufacturer="Yageo / Phycomp", Part Number=RC0402FR-071KL
R3_CH1 R3_CH2 R3_CH3: library part CMP-03412-022079-1, "RES SMD 22 OHM 0.1% 1/8W 0805", Manufacturer=Yageo, Package=RT0805, Power Rating=0.125W, Resistance=22Ω, Temperature="-55°C to +155°C", Temperature Coefficient="25 ppm/°C", Temperature Range High=+155°C, Temperature Range Low=-55°C, Tolerance=0.0025, Voltage Rating=150V, Automotive=No, Category=Res, ComponentLink2Description=Datasheet, ComponentLink2URL=http://www.yageo.com/documents/recent/PYu-RT_1-to-0.01_RoHS_L_9.pdf, Composition="Thin Film", Device Class L1="Passive Components", Device Class L2=Resistors, Device Class L3="Chip SMD Resistors", Digikey Description="RES SMD 22 OHM 0.1% 1/8W 0805", Footprint Url=http://www.yageo.com/exep/pages/download/literatures/PYu-R_Mount_10.pdf, Height=0.6mm, Ipc Land Pattern Name=RESC200125X50, Lead Free=Yes, Manufacturer Part Number=RT0805BRD0722RL, Mouser Description="Thin Film Resistors - SMD 1/8W 22 ohm .1% 25ppm", Octopart=https://octopart.com/rt0805brd0722rl-yageo-1436111, RoHS=TRUE, Series=RT
R4_CH1 R4_CH2 R4_CH3: library part CMP-2002-08135-1, Manufacturer="Vishay Dale", Part Number=CRCW040210K0FKED
R5_CH1 R5_CH2 R5_CH3: library part CMP-2004-03446-1, Manufacturer=Panasonic, Part Number=ERJ1GNF1003C
R7_CH1 R7_CH2 R7_CH3: library part CMP-2004-00311-1, Manufacturer="Vishay Dale", Part Number=CRCW0201220RFNED
R8_CH1 R8_CH2 R8_CH3 R9_CH1 R9_CH2 R9_CH3: library part CMP-2004-00005-1, Manufacturer=Vishay, Part Number=CRCW0201100RFKED
U1_CH1 U1_CH2 U1_CH3: "Texas Instruments Fluxgate Magnetic-Field Sensor"
U3_CH1 U3_CH2 U3_CH3: library part CMP-2000-07463-1, "Digital Output Magnetic Sensor: Ultra-Low-Power, High-Performance 3-Axis Magnetometer, 1.9 to 3.6 V, -40 to 85 degC, 12-Pin LGA, RoHS, Tape and Reel", Case\/Package=Module, Manufacturer=STMicroelectronics, Max Operating Temperature=85degC, Max Supply Current=270uA, Max Supply Voltage=3.6V, Min Operating Temperature=-40degC, Min Supply Voltage=1.9V, Package Description="12-Pin Land Grid Array Package, Body 2 x 2 mm, Pitch 0.5 mm", Package Quantity=8000, Package Reference=LGA-12, Contact Plating=Gold, Datasheet URL=http://www.st.com/content/ccc/resource/technical/document/datasheet/54/2a/85/76/e3/97/42/18/DM00075867.pdf/files/DM00075867.pdf/jcr:content/translations/en.DM00075867.pdf, Datasheet Version="Rev. 6, 05/2017", Lead Free=LeadFree, Manufacturer URL=http://www.st.com/, Mount=SurfaceMount, Mounting Technology=SurfaceMount, Number of Pins=12, Packaging=TapeandReel, Radiation Hardening=No, REACH SVHC=NoSVHC, Resolution=16b, RoHSCompliant=true
U14_AVDD U14_DVDD: library part CMP-0786-00090-1, "1 A, Low Dropout, CMOS Linear Regulator, 2.5 to 5.5 V Vin, 3.3 V Vout, Industrial, 8-pin QFN (CP-8-2), Reel", Manufacturer="Analog Devices", Preset Vout Values (V)=3.3, Supply Current IGND @ Small Load=50uA, ComponentLink1Description="Manufacturer URL", ComponentLink1URL=http://www.analog.com/en/index.html, ComponentLink2Description=Datasheet, ComponentLink2URL=http://www.analog.com/static/imported-files/data_sheets/ADP1706_1707_1708.pdf, ComponentLink3Description="Package Specification", ComponentLink3URL=http://www.analog.com/static/imported-files/packages/56953322593982CP_8_2.pdf, ComponentLink4Description="URL Link1", ComponentLink4URL="Product URL:http://www.analog.com/en/ADP1706/productSearch.html", DatasheetVersion="Rev. 0", Iout max=1A, Mounting Technology="Surface Mount", PackageDescription="8-Pin Lead Frame Chip Scale Package, Body 3 x 3 mm, Pitch 0.5 mm", PackageReference=CP-8-2, PackageVersion="061507-B, 06/2007", Packing=Reel, partnumber=ADP1706ACPZ-3.3-R7, Vin (max) (V)=5.5, Vin (min) (V)=2.5

## Via types
v1: diameter 0.508, hole 0.203, Top Layer to Bottom Layer, 39 vias
v2: diameter 0.5, hole 0.2, Top Layer to Bottom Layer, 16 vias
v3: diameter 0.457, hole 0.152, Top Layer to Bottom Layer, 12 vias
v4: diameter 1.8, hole 1.2, Top Layer to Bottom Layer, 2 vias

## Nets (pads, with @x,y where several pads share a name; then routed paths per layer and width w, separated by ;. In a path a pad name is that pad's centre, name@x,y a point inside that pad or via, vN(x,y) a via of type N, cw(c..) or ccw(c..) an arc to the next point about the centre after c; other vN are vias at no path point)
+5V: C71_AVDD.2 C71_DVDD.2 J1.1 U14_AVDD.3 U14_AVDD.4 U14_DVDD.3 U14_DVDD.4
adc1_in0_CH1: L1_CH1.H8
adc1_in0_CH2: L1_CH2.H8
adc1_in0_CH3: L1_CH3.H8
adc1_in1_CH1: L1_CH1.H7
adc1_in1_CH2: L1_CH2.H7
adc1_in1_CH3: L1_CH3.H7
adc2_in2_CH1: L1_CH1.J8
adc2_in2_CH2: L1_CH2.J8
adc2_in2_CH3: L1_CH3.J8
adc3_in3_CH1: L1_CH1.H6
adc3_in3_CH2: L1_CH2.H6
adc3_in3_CH3: L1_CH3.H6
AVDD: C4_CH1.2 C5_CH1.2 C6_CH1.2 C8_CH1.2 C72_AVDD.2 D1_CH1.1 L1_CH1.D6 L1_CH1.G7 L1_CH1.H1 L1_CH1.J7 R4_CH1.1 U1_CH1.3 U1_CH1.8 U1_CH1.9 U3_CH1.5 U3_CH1.6 U14_AVDD.5 U14_AVDD.6 U14_AVDD.7 | length 14.6
  Top Layer w0.127: C6_CH1.2@55.499,109.223 55.476,109.2 55.5,109.176 C6_CH1.2
  Top Layer w0.152: U1_CH1.3 55.25,123 55.4,123.15 57.733,123.15 v1(58.297,122.586)
  Top Layer w0.2: C6_CH1.2@55.499,109.223 55.499,110.55 U3_CH1.5
  Top Layer w0.203: v1(49.85,119.55) 51.95,119.55 52.45,120.05 U1_CH1.9@52.99,120.05 ; v1(49.85,121.05) C4_CH1.2 51.05,121 51.95,121 52.4,120.55 U1_CH1.8@53.175,120.55 ; R4_CH1.1 v1(61.95,121.05)
  other v1: 38.125,29.3 40.625,29.3 38.125,32.35 40.625,32.35 27.425,36.75 31.425,36.75 35.425,36.75 39.425,36.75 27.425,40.3 31.425,40.3 35.425,40.3 39.425,40.3
AVDD_CH2: C4_CH2.2 C5_CH2.2 C6_CH2.2 C8_CH2.2 D1_CH2.1 L1_CH2.D6 L1_CH2.G7 L1_CH2.H1 L1_CH2.J7 R4_CH2.1 U1_CH2.3 U1_CH2.8 U1_CH2.9 U3_CH2.5 U3_CH2.6
AVDD_CH3: C4_CH3.2 C5_CH3.2 C6_CH3.2 C8_CH3.2 D1_CH3.1 L1_CH3.D6 L1_CH3.G7 L1_CH3.H1 L1_CH3.J7 R4_CH3.1 U1_CH3.3 U1_CH3.8 U1_CH3.9 U3_CH3.5 U3_CH3.6
AVDD_DVDD: C72_DVDD.2 U14_DVDD.5 U14_DVDD.6 U14_DVDD.7
  other v1: 17.799,29.275 20.299,29.275 17.799,32.325 20.299,32.325
BUS0_CH1: L1_CH1.E6
BUS0_CH2: L1_CH2.E6
BUS0_CH3: L1_CH3.E6
BUS1_CH1: L1_CH1.F8
BUS1_CH2: L1_CH2.F8
BUS1_CH3: L1_CH3.F8
BUS2_CH1: L1_CH1.F7
BUS2_CH2: L1_CH2.F7
BUS2_CH3: L1_CH3.F7
BUS3_CH1: L1_CH1.F6
BUS3_CH2: L1_CH2.F6
BUS3_CH3: L1_CH3.F6
BUS4_CH1: L1_CH1.H4
BUS4_CH2: L1_CH2.H4
BUS4_CH3: L1_CH3.H4
BUS5_CH1: L1_CH1.J4
BUS5_CH2: L1_CH2.J4
BUS5_CH3: L1_CH3.J4
BUS6_CH1: L1_CH1.E2
BUS6_CH2: L1_CH2.E2
BUS6_CH3: L1_CH3.E2
BUS7_CH1: L1_CH1.E1
BUS7_CH2: L1_CH2.E1
BUS7_CH3: L1_CH3.E1
BUS8_CH1: L1_CH1.E3
BUS8_CH2: L1_CH2.E3
BUS8_CH3: L1_CH3.E3
BUS9_CH1: L1_CH1.D2
BUS9_CH2: L1_CH2.D2
BUS9_CH3: L1_CH3.D2
BUS10_CH1: L1_CH1.B3
BUS10_CH2: L1_CH2.B3
BUS10_CH3: L1_CH3.B3
BUS11_CH1: L1_CH1.A3
BUS11_CH2: L1_CH2.A3
BUS11_CH3: L1_CH3.A3
BUS12_CH1: L1_CH1.B4
BUS12_CH2: L1_CH2.B4
BUS12_CH3: L1_CH3.B4
BUS13_CH1: L1_CH1.B8
BUS13_CH2: L1_CH2.B8
BUS13_CH3: L1_CH3.B8
BUS14_CH1: L1_CH1.C8
BUS14_CH2: L1_CH2.C8
BUS14_CH3: L1_CH3.C8
BUS15_CH1: L1_CH1.D8
BUS15_CH2: L1_CH2.D8
BUS15_CH3: L1_CH3.D8
BUS_C0_CH1: L1_CH1.D1
BUS_C0_CH2: L1_CH2.D1
BUS_C0_CH3: L1_CH3.D1
BUS_C1_CH1: L1_CH1.D3
BUS_C1_CH2: L1_CH2.D3
BUS_C1_CH3: L1_CH3.D3
BUS_C2_CH1: L1_CH1.C2
BUS_C2_CH2: L1_CH2.C2
BUS_C2_CH3: L1_CH3.C2
BUS_C3_CH1: L1_CH1.C1
BUS_C3_CH2: L1_CH2.C1
BUS_C3_CH3: L1_CH3.C1
BUS_C4_CH1: L1_CH1.C3
BUS_C4_CH2: L1_CH2.C3
BUS_C4_CH3: L1_CH3.C3
BUS_C5_CH1: L1_CH1.C4
BUS_C5_CH2: L1_CH2.C4
BUS_C5_CH3: L1_CH3.C4
BUS_C6_CH1: L1_CH1.A1
BUS_C6_CH2: L1_CH2.A1
BUS_C6_CH3: L1_CH3.A1
BUS_C7_CH1: L1_CH1.A2
BUS_C7_CH2: L1_CH2.A2
BUS_C7_CH3: L1_CH3.A2
CHN_IN_BT0_CH1: L1_CH1.C7
CHN_IN_BT0_CH2: L1_CH2.C7
CHN_IN_BT0_CH3: L1_CH3.C7
CHN_IN_RST_CH1: L1_CH1.E7 R5_CH1.2
CHN_IN_RST_CH2: L1_CH2.E7 R5_CH2.2
CHN_IN_RST_CH3: L1_CH3.E7 R5_CH3.2
CHN_OUT_BT0_CH1: L1_CH1.D7
CHN_OUT_BT0_CH2: L1_CH2.D7
CHN_OUT_BT0_CH3: L1_CH3.D7
CHN_OUT_RST_CH1: L1_CH1.E8
CHN_OUT_RST_CH2: L1_CH2.E8
CHN_OUT_RST_CH3: L1_CH3.E8
CMP1_CH1: R3_CH1.1 U1_CH1.14 U1_CH1.16 | length 8.9
  Top Layer w0.203: U1_CH1.14@55.75,118.3 55.75,116.5 56.05,116.2 R3_CH1.1 58.25,116.2 58.65,116.6 58.65,119.3 58.4,119.55 U1_CH1.16@57.5,119.55
CMP1_CH2: R3_CH2.1 U1_CH2.14 U1_CH2.16
CMP1_CH3: R3_CH3.1 U1_CH3.14 U1_CH3.16
CMP2_CH1: U1_CH1.11 U1_CH1.17 | length 12.7
  Top Layer w0.203: U1_CH1.11@54.25,118.575 54.253,118.572 54.253,117.408 v3(54.256,117.405) ; v3(56.9,115) 57.55,115 59,116.45 59,119.45 58.4,120.05 U1_CH1.17@57.5,120.05
  Signal1 w0.203: v3(54.256,117.405) 54.25,117.399 54.25,116.6 55.85,115 v3(56.9,115)
CMP2_CH2: U1_CH2.11 U1_CH2.17
CMP2_CH3: U1_CH3.11 U1_CH3.17
dac1_out1_CH1: L1_CH1.J6
dac1_out1_CH2: L1_CH2.J6
dac1_out1_CH3: L1_CH3.J6
dac1_out2_CH1: L1_CH1.J5
dac1_out2_CH2: L1_CH2.J5
dac1_out2_CH3: L1_CH3.J5
DRV1_CH1: R3_CH1.2 U1_CH1.12 U1_CH1.13 | length 2.9
  Top Layer w0.203: R3_CH1.2 U1_CH1.12@54.75,118.449 ; U1_CH1.12@54.75,118.575 U1_CH1.12@54.75,118.449 ; U1_CH1.13@55.25,118.475 54.776,118.475 U1_CH1.12@54.75,118.449
DRV1_CH2: R3_CH2.2 U1_CH2.12 U1_CH2.13
DRV1_CH3: R3_CH3.2 U1_CH3.12 U1_CH3.13
EN_AVDD: U14_AVDD.1 U14_DVDD.1 | length 2.6
  Top Layer w0.203: v1(10.499,34.725) 10.522,34.748 11.747,34.748 U14_DVDD.1@11.749,34.75 ; v1(30.825,34.75) 30.848,34.773 32.073,34.773 U14_AVDD.1@32.075,34.775
  Signal1 w0.127: v1(10.499,34.725) v1@10.499,34.775 ; v1(30.825,34.75) v1@30.825,34.8
GND: C1_CH1.1 C3_CH1.1 C4_CH1.1 C5_CH1.1 C6_CH1.1 C7_CH1.1 C8_CH1.1 C71_AVDD.1 C71_DVDD.1 C72_AVDD.1 C72_DVDD.1 C73_AVDD.2 C73_DVDD.2 J1.2 J1.3 L1_CH1.C6 L1_CH1.G4 L1_CH1.G5 L1_CH1.G8 L1_CH1.J1 R5_CH1.1 U1_CH1.1 U1_CH1.2 U1_CH1.7 U1_CH1.10 U1_CH1.18 U1_CH1.20 U1_CH1.21 U3_CH1.2 U3_CH1.3 U3_CH1.12 U14_AVDD.2 U14_AVDD.9 U14_DVDD.2 U14_DVDD.9 | length 27.7
  Top Layer w0.152: C73_DVDD.2 12.799,30.897 v1(12.802,30.9) ; C73_AVDD.2 33.125,30.923 v1(33.128,30.925)
  Top Layer w0.203: U14_DVDD.2@11.749,34.25 13.049,34.25 U14_DVDD.9 ; U14_AVDD.2@32.075,34.275 33.375,34.275 U14_AVDD.9 ; v1(48.351,124.148) 48.353,124.15 C3_CH1.1 ; v1(49.85,118.3) C5_CH1.1 51.186,118.486 51.636,118.486 52.7,119.55 U1_CH1.21@54.25,119.55 ; v1(49.85,122.3) C4_CH1.1 51.136,122.164 51.636,122.164 52.741,121.059 53.266,121.059 53.275,121.05 U1_CH1.21@54.75,121.05 ; v1(50.841,111.8) C7_CH1.1@52.435,111.8 ; v1(53.125,110.55) C8_CH1.1@54.719,110.55 ; v1(53.175,109.2) 54.2,109.2 C6_CH1.1 ; U1_CH1.21 U1_CH1.18 U1_CH1.18@57.5,120.55 ; U1_CH1.21@55.75,121.05 U1_CH1.2 ; U1_CH1.1@56.25,122.525 56.25,121.55 U1_CH1.20@57.225,121.55 ; C1_CH1.1 v1(59.244,124.15)
  other v1: 7.099,36.725 11.099,36.725 15.099,36.725 19.099,36.725 7.099,40.275 11.099,40.275 15.099,40.275 19.099,40.275
  other v2: 13.299,33.45 33.625,33.475 13.299,34.55 33.625,34.575 54.7,120 55.8,120 54.7,121.1 55.8,121.1
GND_CH2: C1_CH2.1 C3_CH2.1 C4_CH2.1 C5_CH2.1 C6_CH2.1 C7_CH2.1 C8_CH2.1 L1_CH2.C6 L1_CH2.G4 L1_CH2.G5 L1_CH2.G8 L1_CH2.J1 R5_CH2.1 U1_CH2.1 U1_CH2.2 U1_CH2.7 U1_CH2.10 U1_CH2.18 U1_CH2.20 U1_CH2.21 U3_CH2.2 U3_CH2.3 U3_CH2.12
  other v2: 131.55,58.275 132.65,58.275 131.55,59.375 132.65,59.375
GND_CH3: C1_CH3.1 C3_CH3.1 C4_CH3.1 C5_CH3.1 C6_CH3.1 C7_CH3.1 C8_CH3.1 L1_CH3.C6 L1_CH3.G4 L1_CH3.G5 L1_CH3.G8 L1_CH3.J1 R5_CH3.1 U1_CH3.1 U1_CH3.2 U1_CH3.7 U1_CH3.10 U1_CH3.18 U1_CH3.20 U1_CH3.21 U3_CH3.2 U3_CH3.3 U3_CH3.12
  other v2: 130.8,72.94 131.9,72.94 130.8,74.04 131.9,74.04
I2C2_SCL_CH1: L1_CH1.B2
I2C2_SCL_CH2: L1_CH2.B2
I2C2_SCL_CH3: L1_CH3.B2
I2C2_SDA_CH1: L1_CH1.B1
I2C2_SDA_CH2: L1_CH2.B1
I2C2_SDA_CH3: L1_CH3.B1
led_b_CH1: L1_CH1.A5 R8_CH1.2
led_b_CH2: L1_CH2.A5 R8_CH2.2
led_b_CH3: L1_CH3.A5 R8_CH3.2
led_g_CH1: L1_CH1.B5 R9_CH1.2
led_g_CH2: L1_CH2.B5 R9_CH2.2
led_g_CH3: L1_CH3.B5 R9_CH3.2
led_r_CH1: L1_CH1.C5 R7_CH1.2
led_r_CH2: L1_CH2.C5 R7_CH2.2
led_r_CH3: L1_CH3.C5 R7_CH3.2
NetC7_CH1_2: C7_CH1.2 U3_CH1.4 | length 1.8
  Top Layer w0.127: C7_CH1.2@53.215,111.8 U3_CH1.4
NetC7_CH2_2: C7_CH2.2 U3_CH2.4
NetC7_CH3_2: C7_CH3.2 U3_CH3.4
NetC73_AVDD_1: C73_AVDD.1 U14_AVDD.8 | length 7.7
  Top Layer w0.203: C73_AVDD.1 v3(34.975,29.8) ; U14_AVDD.8@35.175,34.775 v3(36.36,34.775)
  Signal1 w0.203: v3(34.975,29.8) 35.225,29.8 36.36,30.935 v3(36.36,34.775)
NetC73_DVDD_1: C73_DVDD.1 U14_DVDD.8 | length 7.7
  Top Layer w0.203: C73_DVDD.1 v3(14.649,29.775) ; U14_DVDD.8@14.849,34.75 v3(16.034,34.75)
  Signal1 w0.203: v3(14.649,29.775) 14.899,29.775 16.034,30.91 v3(16.034,34.75)
NetD1_CH1_2: D1_CH1.2 R9_CH1.1 | length 2.6
  Top Layer w0.127: D1_CH1.2 61.7,110.6 62.175,111.075 R9_CH1.1
NetD1_CH1_3: D1_CH1.3 R8_CH1.1 | length 1.4
  Top Layer w0.127: D1_CH1.3 62.05,109.8 62.35,110.1 R8_CH1.1
NetD1_CH1_4: D1_CH1.4 R7_CH1.1 | length 0.9
  Top Layer w0.127: D1_CH1.4 R7_CH1.1
NetD1_CH2_2: D1_CH2.2 R9_CH2.1
NetD1_CH2_3: D1_CH2.3 R8_CH2.1
NetD1_CH2_4: D1_CH2.4 R7_CH2.1
NetD1_CH3_2: D1_CH3.2 R9_CH3.1
NetD1_CH3_3: D1_CH3.3 R8_CH3.1
NetD1_CH3_4: D1_CH3.4 R7_CH3.1
NetR1_CH1_1: R1_CH1.1 U1_CH1.4 U1_CH1.5 | length 2.3
  Top Layer w0.127: U1_CH1.5 U1_CH1.4 R1_CH1.1
NetR1_CH2_1: R1_CH2.1 U1_CH2.4 U1_CH2.5
NetR1_CH3_1: R1_CH3.1 U1_CH3.4 U1_CH3.5
NetR2_CH1_1: R2_CH1.1 U1_CH1.6 | length 2.6
  Top Layer w0.127: U1_CH1.6@53.275,121.55 R2_CH1.1
NetR2_CH2_1: R2_CH2.1 U1_CH2.6
NetR2_CH3_1: R2_CH3.1 U1_CH3.6
NetR4_CH1_2: R4_CH1.2 U1_CH1.15 U1_CH1.19 | length 8.8
  Top Layer w0.203: U1_CH1.15@56.25,118.3 56.25,117.75 56.7,117.3 v3(57.6,117.3) ; U1_CH1.19@57.351,121.05 v3(58.55,121.05) R4_CH1.2
  Signal1 w0.203: v3(57.6,117.3) 58.55,118.25 v3(58.55,121.05)
NetR4_CH2_2: R4_CH2.2 U1_CH2.15 U1_CH2.19
NetR4_CH3_2: R4_CH3.2 U1_CH3.15 U1_CH3.19
sd_adc1_in_CH1_N: C1_CH1.2 C2_CH1.2 L1_CH1.H3 R1_CH1.2 | length 16.2
  Top Layer w0.127: R1_CH1.2 v3(56.567,124.15) C1_CH1.2 ; v3(60.1,124.15) C2_CH1.2
  Signal1 w0.127: v3(56.567,124.15) 57.418,125 61.022,125 61.35,124.672 61.35,124.15 ; v3(60.1,124.15) 61.35,124.15 ; 60.226,118.385 60.226,121.826 61.35,122.95 61.35,124.15
sd_adc1_in_CH1_P: C2_CH1.1 C3_CH1.2 L1_CH1.J3 R2_CH1.2 | length 22.5
  Top Layer w0.127: C3_CH1.2 v3(51.312,124.15) R2_CH1.2 ; C2_CH1.1 v3(62.95,124.15)
  Signal1 w0.127: v3(51.312,124.15) 51.312,124.175 52.392,125.254 61.127,125.254 61.604,124.777 61.604,124.15 ; 60.48,118.28 60.48,121.72 61.604,122.845 61.604,124.15 ; v3(62.95,124.15) 61.604,124.15
sd_adc1_in_CH2_N: C1_CH2.2 C2_CH2.2 L1_CH2.H3 R1_CH2.2
sd_adc1_in_CH2_P: C2_CH2.1 C3_CH2.2 L1_CH2.J3 R2_CH2.2
sd_adc1_in_CH3_N: C1_CH3.2 C2_CH3.2 L1_CH3.H3 R1_CH3.2
sd_adc1_in_CH3_P: C2_CH3.1 C3_CH3.2 L1_CH3.J3 R2_CH3.2
sd_adc2_in2_CH1: L1_CH1.J2
sd_adc2_in2_CH2: L1_CH2.J2
sd_adc2_in2_CH3: L1_CH3.J2
sd_adc3_in3_CH1: L1_CH1.F3
sd_adc3_in3_CH2: L1_CH2.F3
sd_adc3_in3_CH3: L1_CH3.F3
spi2_cs_CH1: L1_CH1.A7 U3_CH1.10
spi2_cs_CH2: L1_CH2.A7 U3_CH2.10
spi2_cs_CH3: L1_CH3.A7 U3_CH3.10
spi2_miso_CH1: L1_CH1.F2 U3_CH1.11
spi2_miso_CH2: L1_CH2.F2 U3_CH2.11
spi2_miso_CH3: L1_CH3.F2 U3_CH3.11
spi2_mosi_CH1: L1_CH1.F1 U3_CH1.9
spi2_mosi_CH2: L1_CH2.F1 U3_CH2.9
spi2_mosi_CH3: L1_CH3.F1 U3_CH3.9
spi2_sck_CH1: L1_CH1.B7 U3_CH1.1
spi2_sck_CH2: L1_CH2.B7 U3_CH2.1
spi2_sck_CH3: L1_CH3.B7 U3_CH3.1
st_mag_drdy_CH1: L1_CH1.H2 U3_CH1.8
st_mag_drdy_CH2: L1_CH2.H2 U3_CH2.8
st_mag_drdy_CH3: L1_CH3.H2 U3_CH3.8
st_mag_int_CH1: L1_CH1.G3 U3_CH1.7
st_mag_int_CH2: L1_CH2.G3 U3_CH2.7
st_mag_int_CH3: L1_CH3.G3 U3_CH3.7
TIMER_SYNC_0_CH1: L1_CH1.A4
TIMER_SYNC_0_CH2: L1_CH2.A4
TIMER_SYNC_0_CH3: L1_CH3.A4
TIMER_SYNC_1_CH1: L1_CH1.H5
TIMER_SYNC_1_CH2: L1_CH2.H5
TIMER_SYNC_1_CH3: L1_CH3.H5
UART1_RX_TP_CH1: L1_CH1.A6
UART1_RX_TP_CH2: L1_CH2.A6
UART1_RX_TP_CH3: L1_CH3.A6
UART1_TX_TP_CH1: L1_CH1.B6
UART1_TX_TP_CH2: L1_CH2.B6
UART1_TX_TP_CH3: L1_CH3.B6
VREF_3V3: L1_CH1.G1 L1_CH1.G6
VREF_3V3_CH2: L1_CH2.G1 L1_CH2.G6
VREF_3V3_CH3: L1_CH3.G1 L1_CH3.G6
pads on no net: J1. L1_CH1.A8 L1_CH1.G2 L1_CH2.A8 L1_CH2.G2 L1_CH3.A8 L1_CH3.G2
copper on no net:
  other v4: 18.475,2.3 18.475,8.7

## Polygon pours and split planes (outlines as drawn)
GND on Top Layer "GND_L01_P000" (solid, pour order 0): 34.35,32.4 34.35,35.8 36.075,35.8 37.275,34.6 40.825,34.6 41.575,35.35 41.575,41.6 40.825,42.35 26.575,42.35 25.675,41.45 25.675,35.3 26.375,34.6 29.525,34.6 30.725,35.8 32.9,35.8 32.9,32.4
AVDD on Top Layer "AVDD_L01_P001" (solid, pour order 1): 34.679,34.079 35,34.4 40.875,34.4 41.575,33.7 41.575,26.5 41.075,26 35.175,26 34.679,26.496
+5V on Top Layer "+5V_L01_P002" (solid, pour order 2): 32.471,34.054 32.15,34.375 26.275,34.375 25.575,33.675 25.575,25.4 32.471,25.4
GND on Top Layer "GND_L01_P004" (solid, pour order 4): 14.024,32.375 14.024,35.775 15.749,35.775 16.949,34.575 20.499,34.575 21.249,35.325 21.249,41.575 20.499,42.325 6.249,42.325 5.349,41.425 5.349,35.275 6.049,34.575 9.199,34.575 10.399,35.775 12.574,35.775 12.574,32.375
AVDD_DVDD on Top Layer "AVDD_DVDD_L01_P005" (solid, pour order 5): 14.353,34.054 14.674,34.375 20.549,34.375 21.249,33.675 21.249,26.475 20.749,25.975 14.849,25.975 14.353,26.471
+5V on Top Layer "+5V_L01_P007" (solid, pour order 7): 12.145,34.029 11.824,34.35 5.949,34.35 5.249,33.65 5.249,25.375 12.145,25.375
GND on GND1 (split plane): 169.49,249.49 169.49,0.51 0.51,0.51 0.51,249.49
AVDD on AVDD (split plane): 169.49,249.49 169.49,0.51 0.51,0.51 0.51,249.49

## Other copper
Signal1:

## Silkscreen, mask and mechanical layers (free items; w line width, h text height)
Assembly Notes:
  circle w0.254: c55.75,156.55 r7.75
  circle w0.254: c55.75,195.55 r7.75
  circle w0.254: c94.75,156.55 r7.75
  circle w0.254: c94.75,195.55 r7.75
  circle w0.254: c55.75,117.55 r7.75
  circle w0.254: c55.75,137.05 r7.75
  circle w0.254: c55.75,176.05 r7.75
  circle w0.254: c94.75,117.55 r7.75
  circle w0.254: c94.75,137.05 r7.75
  circle w0.254: c94.75,176.05 r7.75
  circle w0.254: c114.25,156.55 r7.75
  circle w0.254: c75.25,156.55 r7.75
  circle w0.254: c114.25,195.55 r7.75
  circle w0.254: c75.25,195.55 r7.75
  circle w0.254: c114.25,117.55 r7.75
  circle w0.254: c75.25,117.55 r7.75
  circle w0.254: c114.25,137.05 r7.75
  circle w0.254: c75.25,137.05 r7.75
  circle w0.254: c114.25,176.05 r7.75
  circle w0.254: c75.25,176.05 r7.75
  circle w0.254: c55.75,215.05 r7.75
  circle w0.254: c94.75,215.05 r7.75
  circle w0.254: c75.25,215.05 r7.75
  circle w0.254: c114.25,215.05 r7.75

## Dimensions
0,250 to 170,250 on Mechanical 15
170,0 to 170,250 on Mechanical 15